# Altium PCB PCB1.PcbDoc
Units mil, origin at the board's own origin, x right, y up, seen from the top; angles counter-clockwise.
Board outline 3500 x 1750 mil, 2 copper layers (Top Layer, Bottom Layer); 19 components, 14 nets, 69 pads, 4 vias.
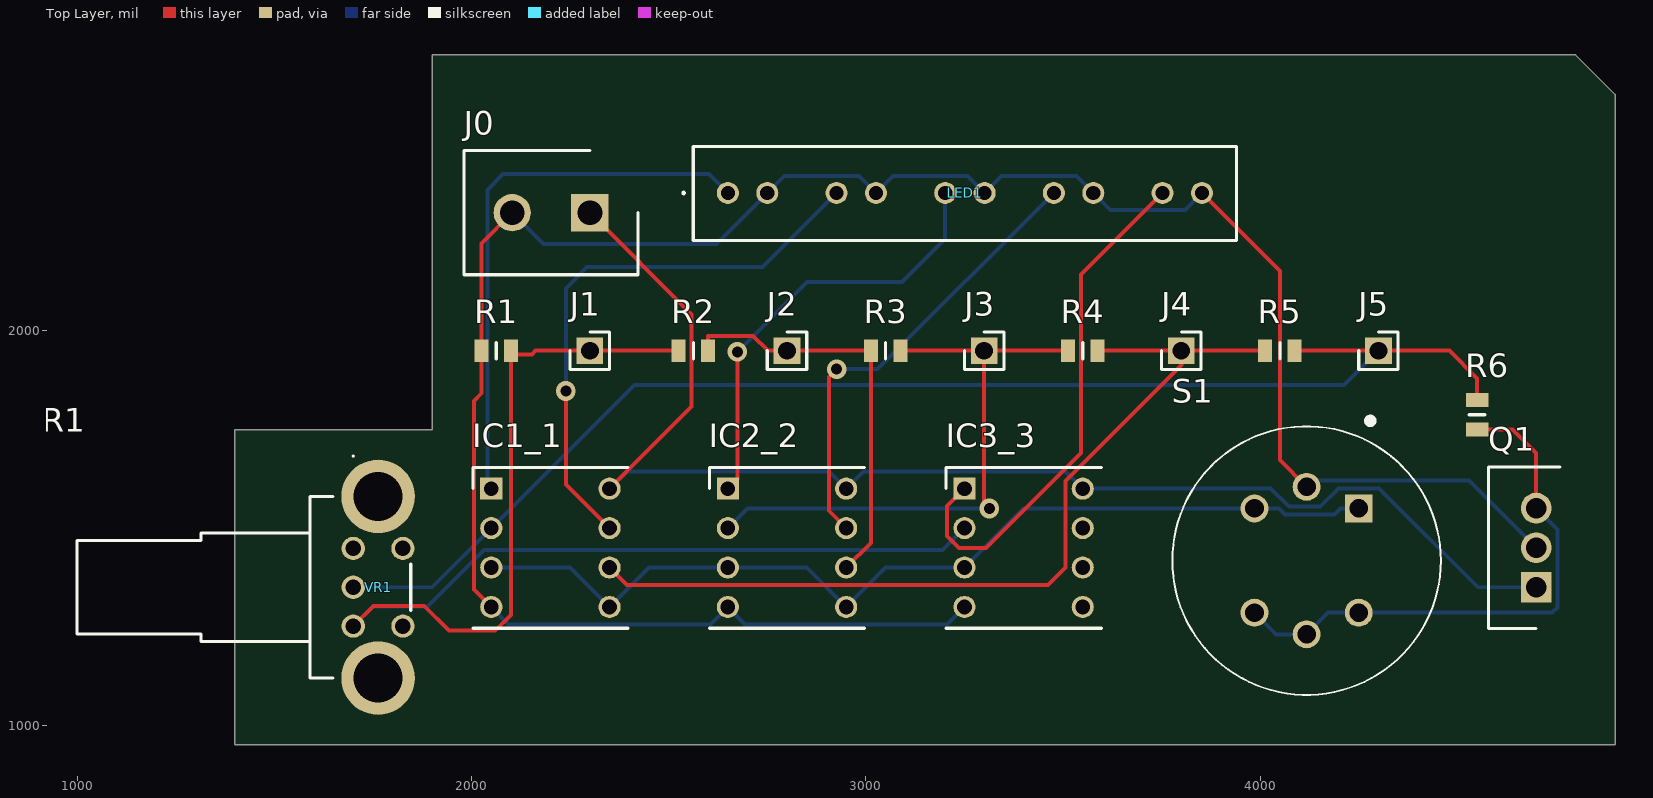
[diagram p0: Top Layer view]
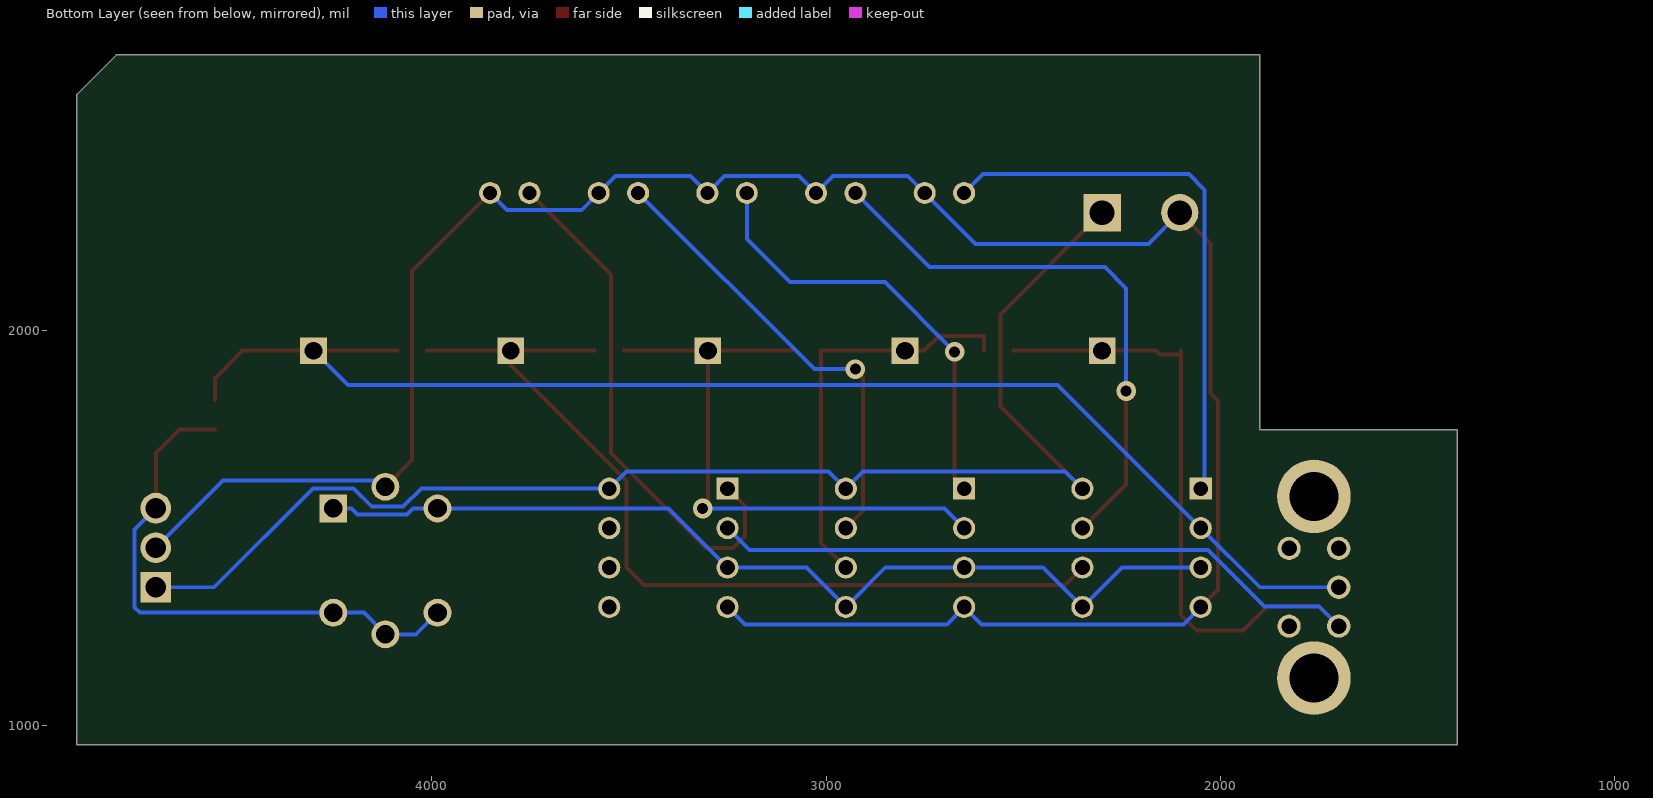
[diagram p1: Bottom Layer view, seen from below]
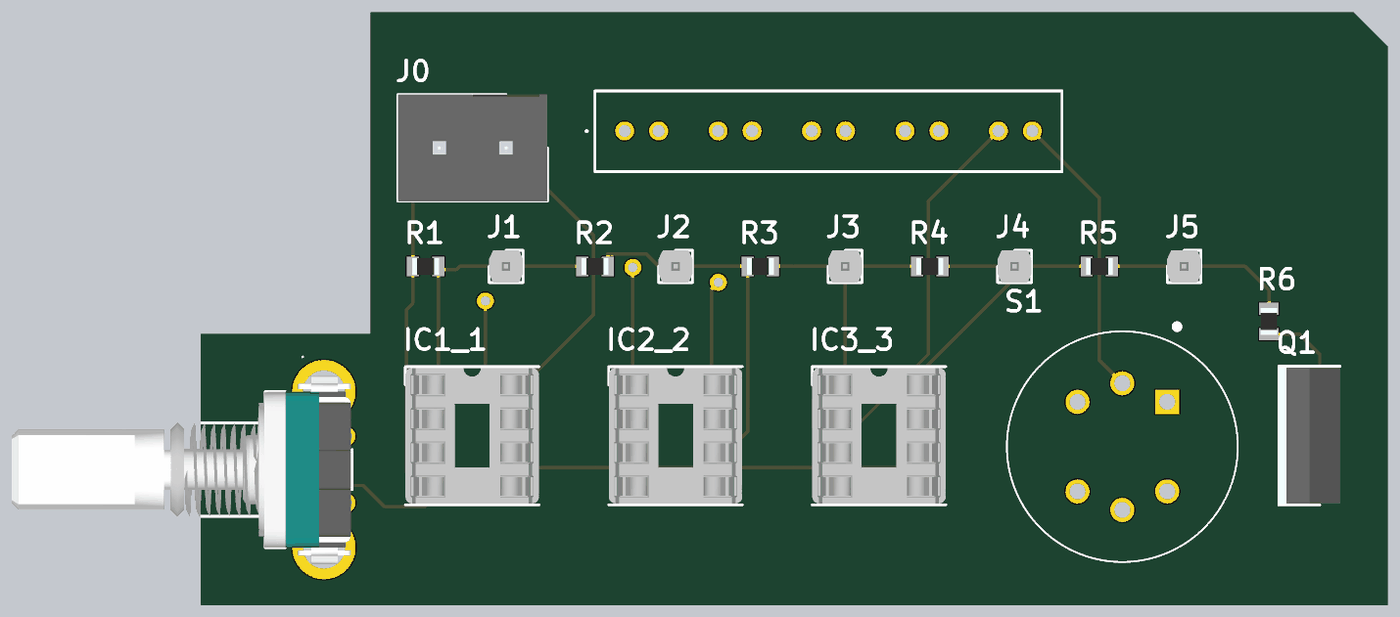
[diagram p2: 3D render of the assembled board from above, using the file's embedded part models]

## Layer stack, top to bottom
Top Solder: solder mask 0.4, Solder Resist, Dk 3.5
Top Layer: signal copper 1.4
Dielectric 1: dielectric 12.6, FR-4, Dk 4.8
Bottom Layer: signal copper 1.4
Bottom Solder: solder mask 0.4, Solder Resist, Dk 3.5

## Board outline
1900,1750 1400,1750 1400,950 4900,950 4900,2600 4800,2700 1900,2700

## Design rules (kind name [scope] priority, off if disabled: settings)
Clearance [All] p1: gap=10 ignorepadtopadclearanceinfootprint=FALSE except(0: Arc-Hole Track-Hole SMDPad-Hole THPad-Hole Via-Hole Fill-Hole Poly-Hole Region-Hole Text-Hole)
PolygonConnect [All] p1: connectstyle=Relief reliefconductorwidth=10 reliefentries=4 polygonreliefangle="90 Angle" airgapwidth=10
RoutingVias [All] p1: holewidth=28 width=50 viastyle="Through Hole" minholewidth=28 minwidth=50 maxholewidth=28 maxwidth=50
SolderMaskExpansion [All] p1: expansion=4 istentingtop=FALSE
Width [All] p1: maxlimit=10 minlimit=10 preferedwidth=10
30 further rules are at their usual default settings.

## Components (designator, comment, footprint, x,y, rotation, side; value= is the part's Value field where it differs from the comment)
IC1_1 "1-2199298-2" DIPS762W70P254L1016H510Q8N 2050,1600 r0 top
IC2_2 "1-2199298-2" DIPS762W70P254L1016H510Q8N 2650,1600 r0 top
IC3_3 "1-2199298-2" DIPS762W70P254L1016H510Q8N 3250,1600 r0 top
J0 "Screwheader" SHDR2W100P0X500_1X2_1120X800X1100P 2300,2300 r180 top
J1 "68024-100HLF" HDRV1W67P0X254_1X1_254X241X1082P 2300,1950 r0 top
J2 "68024-100HLF" HDRV1W67P0X254_1X1_254X241X1082P 2800,1950 r0 top
J3 "68024-100HLF" HDRV1W67P0X254_1X1_254X241X1082P 3300,1950 r0 top
J4 "68024-100HLF" HDRV1W67P0X254_1X1_254X241X1082P 3800,1950 r0 top
J5 "68024-100HLF" HDRV1W67P0X254_1X1_254X241X1082P 4300,1950 r0 top
LED1 "SSA-LXB525ID" SSALXB525ID 2650,2350 r0 top
Q1 "Regulator" TO255P460X1020X1968-3P 4700,1350 r90 top
R1 "MCU0805MD3304BP500" RESC2012X62N 2062.6,1950 r0 top
R2 "MCU0805MD3304BP500" RESC2012X62N 2562.6,1950 r0 top
R3 "MCU0805MD3304BP500" RESC2012X62N 3050,1950 r0 top
R4 "MCU0805MD3304BP500" RESC2012X62N 3550,1950 r0 top
R5 "MCU0805MD3304BP500" RESC2012X62N 4050,1950 r0 top
R6 "MCU0805MD3304BP500" RESC2012X62N 4550,1787.4 r270 top
S1 "Sensor" XDCR_SEN-08880 4117.77,1417.77 r270 top
VR1 "PRS11R-215F-S103B1" PRS11R215FS103B1 1700,1448.43 r270 top

## Footprints (in the part's own frame and the unit in brackets; to place one, negate y for a bottom-side part, rotate by r counter-clockwise, add the part's x,y. Pads: shape width x height; smd on the part's side, far side on the other; paste and mask are expansions set on the pad)
DIPS762W70P254L1016H510Q8N [mm]
  rect 1.425x1.425 hole 0.95: 1(0,0)
  round 1.425 hole 0.95: 2(0,-2.54) 3(0,-5.08) 4(0,-7.62) 5(7.62,-7.62) 6(7.62,-5.08) 7(7.62,-2.54) 8(7.62,0)
  silkscreen extent -1.19,-8.99 8.81,1.37, body extent -1.19,-8.89 8.81,1.27, height 4.84
HDRV1W67P0X254_1X1_254X241X1082P [mm]
  rect 1.725x1.725 hole 1.15: 1(0,0)
  silkscreen extent -1.27,-1.2 1.27,1.2, body extent -1.27,-1.21 1.27,1.21, height 10.61
PRS11R215FS103B1 [mm]
  round 1.5 hole 1: 1(0,0) 2(2.5,0) 3(5,0) 4(0,3.2) 5(5,3.2)
  round 4.74 hole 3.16: MH1(-3.35,1.6) MH2(8.35,1.6)
  silkscreen extent -6,-17.8 8.35,3.7, body extent -4.54,-21.78 9.55,3.62, height 13.11
RESC2012X62N [mm]
  rect 0.9x1.45 smd: 1(-0.95,0) 2(0.95,0)
  silkscreen extent 0,-0.53 0,0.53, body extent -1,-0.63 1,0.63, height 0.62
SHDR2W100P0X500_1X2_1120X800X1100P [mm]
  rect 2.4x2.4 hole 1.6: 1(0,0)
  round 2.4 hole 1.6: 2(5,0)
  silkscreen extent -3.1,-4 8.1,4, body extent -3.1,-4 8.1,4, height 11
SSALXB525ID [mm]
  round 1.416 hole 0.91: A1(0,0) A2(7,0) A3(14,0) A4(21,0) A5(28,0) B1(2.54,0) B2(9.54,0) B3(16.54,0) B4(23.54,0) B5(30.54,0)
  silkscreen extent -2.9,-3.05 32.77,3, body extent -3.11,-3.94 33.59,3.94, height 0.25
TO255P460X1020X1968-3P [mm]
  rect 1.98x1.98 hole 1.32: 1(0,0)
  round 1.98 hole 1.32: 2(2.55,0) 3(5.1,0)
  silkscreen extent -2.65,-1.53 7.75,3.07, body extent -2.55,-1.53 7.65,3.07, height 19.68
XDCR_SEN-08880 [mm]
  rect 1.8x1.8 hole 1.2: 1(-3.359,3.359)
  round 1.8 hole 1.2: 2(-4.75,0) 3(-3.359,-3.359) 4(3.359,-3.359) 5(4.75,0) 6(3.359,3.359)
  silkscreen extent -9.2,-8.65 8.65,8.65

## Part data
IC1_1 IC2_2 IC3_3: "Integrated Circuit", Manufacturer_Name="TE Connectivity", Mouser Part Number=571-1-2199298-2, Arrow Part Number=1-2199298-2, Arrow Price/Stock=https://www.arrow.com/en/products/1-2199298-2/te-connectivity?region=nac, Datasheet Link=https://componentsearchengine.com/Datasheets/2/1-2199298-2.pdf, Height=5.1mm, Manufacturer_Part_Number=1-2199298-2, Mouser Price/Stock=https://www.mouser.co.uk/ProductDetail/TE-Connectivity/1-2199298-2?qs=fK8dlpkaUMtEKa4wabwOXQ%3D%3D
J0: library part 691111710002, "Connector", Manufacturer_Name="Wurth Elektronik", Mouser Part Number=710-691111710002, Datasheet Link=https://componentsearchengine.com/Datasheets/1/691111710002.pdf, Height=11mm, Manufacturer_Part_Number=691111710002, Mouser Price/Stock=https://www.mouser.co.uk/ProductDetail/Wurth-Elektronik/691111710002?qs=E2PpAYvlWVvK4tIr6ZnZIQ%3D%3D
J1 J2 J3 J4 J5: "Connector", Manufacturer_Name="Amphenol Communications Solutions", Mouser Part Number=649-68024-100HLF, Arrow Part Number=68024-100HLF, Arrow Price/Stock=https://www.arrow.com/en/products/68024-100hlf/amphenol-fci?region=nac, Datasheet Link=https://cdn.amphenol-cs.com/media/wysiwyg/files/drawing/68000.pdf, Height=10.82mm, Manufacturer_Part_Number=68024-100HLF, Mouser Price/Stock=https://www.mouser.co.uk/ProductDetail/Amphenol-FCI/68024-100HLF?qs=DaoqcPPPDvU%252BhB9srASBgQ%3D%3D
LED1: "LED (Multiple)", Manufacturer_Name=Lumex, Mouser Part Number=696-SSA-LXB525ID, Arrow Part Number=SSA-LXB525ID, Arrow Price/Stock=https://www.arrow.com/en/products/ssa-lxb525id/lumex, Datasheet Link=https://datasheet.datasheetarchive.com/originals/dk/DKDS-14/273372.pdf, Height=8.4mm, Manufacturer_Part_Number=SSA-LXB525ID, Mouser Price/Stock=https://www.mouser.co.uk/ProductDetail/Lumex/SSA-LXB525ID?qs=K%252Bxkc0srH7Bjt6LUAQzTgQ%3D%3D
Q1: library part L7805ACV-DG, "Transistor", Manufacturer_Name=STMicroelectronics, Mouser Part Number=511-L7805ACV-DG, Arrow Part Number=L7805ACV-DG, Arrow Price/Stock=https://www.arrow.com/en/products/l7805acv-dg/stmicroelectronics?region=europe, Datasheet Link=https://rs.componentsearchengine.com/Datasheets/2/L7805ACV-DG.pdf, Height=4.6mm, Manufacturer_Part_Number=L7805ACV-DG, Mouser Price/Stock=https://www.mouser.co.uk/ProductDetail/STMicroelectronics/L7805ACV-DG?qs=UOUhb9503hEO7qX1qhGGyg%3D%3D
R1 R2 R3 R4 R5 R6: "Resistor", Manufacturer_Name=Vishay, Mouser Part Number=594-MCU0805MD3304BP5, Datasheet Link=https://www.mouser.in/datasheet/2/427/mc_at_precision-1762846.pdf, Height=0.62mm, Manufacturer_Part_Number=MCU0805MD3304BP500, Mouser Price/Stock=https://www.mouser.co.uk/ProductDetail/Vishay-Beyschlag/MCU0805MD3304BP500?qs=A6eO%252BMLsxmSZlVWVx087zg%3D%3D
VR1: "Variable Resistor", Manufacturer_Name=Bourns, Mouser Part Number=652-PRS11R215FS103B1, Datasheet Link=https://www.mouser.com/catalog/specsheets/Bourns_03252021_PRS11R_datasheet.pdf, Height=13.1mm, Manufacturer_Part_Number=PRS11R-215F-S103B1, Mouser Price/Stock=https://www.mouser.co.uk/ProductDetail/Bourns/PRS11R-215F-S103B1?qs=IS%252B4QmGtzzqZRwzYowTZrA%3D%3D

## Via types
v1: diameter 50, hole 28, Top Layer to Bottom Layer, 4 vias

## Nets (pads, with @x,y where several pads share a name; then routed paths per layer and width w, separated by ;. In a path a pad name is that pad's centre, name@x,y a point inside that pad or via, vN(x,y) a via of type N, cw(c..) or ccw(c..) an arc to the next point about the centre after c; other vN are vias at no path point)
GND: IC1_1.4 IC2_2.4 IC3_3.4 J0.2 LED1.B1 LED1.B2 LED1.B3 LED1.B4 LED1.B5 Q1.2 R1.1 S1.2 | length 5824
  Top Layer w10: IC1_1.4 2006,1344 2006,1822.8 2025.2,1842 R1.1 2025.2,2222.05 J0.2 ; LED1.B5 4050,2152.36 4050,1672.54 S1.2
  Bottom Layer w10: IC1_1.4 2094,1256 2606,1256 IC2_2.4 2694,1256 3206,1256 IC3_3.4 ; J0.2 2182.15,2221 2621,2221 LED1.B1 2793,2393 2982.59,2393 LED1.B2 3068.59,2393 3258.18,2393 LED1.B3 3344.18,2393 3533.77,2393 LED1.B4 3619.77,2307 3809.36,2307 LED1.B5 ; S1.2 4133.99,1621 4529.39,1621 Q1.2
NetIC1_1_1: IC1_1.1 LED1.A1 | length 1414.5
  Bottom Layer w10: IC1_1.1 2040,1600 2040,2358 2080,2398 2602,2398 LED1.A1
NetIC1_1_2: IC1_1.2 J5.1 R5.2 R6.1 VR1.2 | length 3395.3
  Top Layer w10: R5.2 J5.1 4480,1950 4550,1880 R6.1
  Bottom Layer w10: VR1.2 1900,1350 IC1_1.2 2413,1863 4213,1863 J5.1
NetIC1_1_3: IC1_1.3 IC1_1.5 IC2_2.3 IC2_2.5 IC3_3.3 S1.1 S1.3 | length 2440.8
  Bottom Layer w10: IC1_1.3 2250,1400 IC1_1.5 2450,1400 IC2_2.3 2850,1400 IC2_2.5 3050,1400 IC3_3.3 3400,1550 S1.3 4047.33,1550 4062.99,1534.34 4188.22,1534.34 4203.88,1550 S1.1
NetIC1_1_6: IC1_1.6 J4.1 R4.2 R5.1 | length 2289.4
  Top Layer w10: IC1_1.6 2394,1356 3462,1356 3506,1400 3506,1620 3800,1914 J4.1 ; R4.2 J4.1 ; R5.1 J4.1
NetIC1_1_7: IC1_1.7 LED1.A2 | length 1440.8
  Top Layer w10: v1(2239,1848) 2239,1611 IC1_1.7
  Bottom Layer w10: v1(2239,1848) 2239,2108 2293,2162 2737.59,2162 LED1.A2
NetIC1_1_8: IC1_1.8 IC2_2.8 IC3_3.8 J0.1 Q1.1 | length 3459
  Top Layer w10: J0.1 2558,2042 2558,1808 IC1_1.8
  Bottom Layer w10: IC1_1.8 2394,1644 2906,1644 IC2_2.8 2994,1644 3506,1644 IC3_3.8 3935,1600 3936,1601 4026,1601 4072.66,1554.34 4152.34,1554.34 4199,1601 4301,1601 4552,1350 Q1.1
NetIC2_2_1: IC2_2.1 LED1.A3 | length 1119.5
  Top Layer w10: IC2_2.1 2674,1624 v1(2674,1947)
  Bottom Layer w10: v1(2674,1947) 2851,2124 3092,2124 3201.18,2233.18 LED1.A3
NetIC2_2_2: IC2_2.2 J3.1 R3.2 R4.1 | length 1514.3
  Top Layer w10: R3.2 J3.1 ; v1(3313,1550) 3300,1563 J3.1 ; R4.1 J3.1
  Bottom Layer w10: IC2_2.2 2700,1550 v1(3313,1550)
NetIC2_2_6: IC2_2.6 J2.1 R2.2 R3.1 | length 1041.1
  Top Layer w10: R2.2 2600,1987.2 2714.13,1987.2 2751.32,1950 J2.1 R3.1 3012.6,1462.6 IC2_2.6
NetIC2_2_7: IC2_2.7 LED1.A4 | length 1165.4
  Top Layer w10: v1(2926,1903) 2906,1883 2906,1544 IC2_2.7
  Bottom Layer w10: v1(2926,1903) 3029.77,1903 LED1.A4
NetIC3_3_1: IC3_3.1 LED1.A5 | length 1335
  Top Layer w10: IC3_3.1 3206,1556 3206,1480 3236,1450 3305,1450 3546,1691 3546,2143.64 LED1.A5
NetIC3_3_2: IC3_3.2 J1.1 R1.2 R2.1 VR1.3 | length 3215.9
  Top Layer w10: VR1.3 1751.43,1303 1880,1303 1943,1240 2060,1240 2100,1280 R1.2@2100,1940.83 ; R1.2 R1.2@2100,1940.83 ; R2.1 J1.1 2162.45,1950 2153.28,1940.83 R1.2@2100,1940.83
  Bottom Layer w10: VR1.3 1749.43,1301 1888,1301 2031,1444 3194,1444 IC3_3.2
NetQ1_3: Q1.3 R6.2 S1.4 S1.5 S1.6 | length 1407.6
  Top Layer w10: R6.2 4640,1750 4700,1690 Q1.3
  Bottom Layer w10: S1.4 4040.3,1230.76 S1.5 4172.54,1285.53 S1.6 4740.53,1285.53 4754,1299 4754,1496.79 Q1.3
pads on no net: IC3_3.5 IC3_3.6 IC3_3.7 VR1.1 VR1.4 VR1.5 VR1.MH1 VR1.MH2